# EAGLE board relay-unit-XRF (EAGLE 6.4)
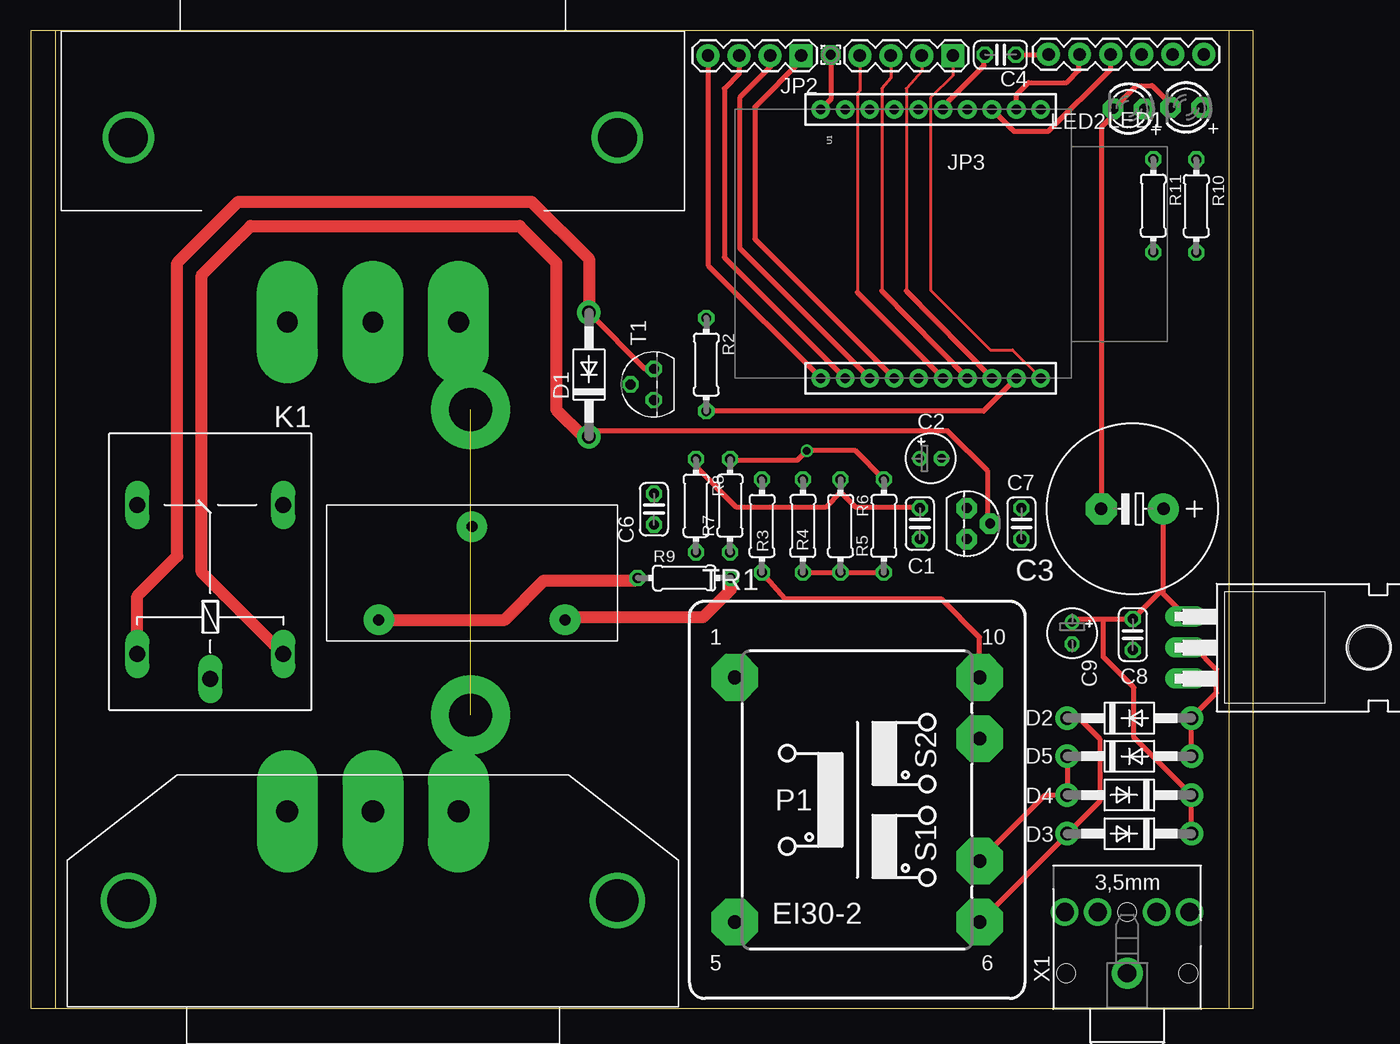
[diagram p0: board, top side]
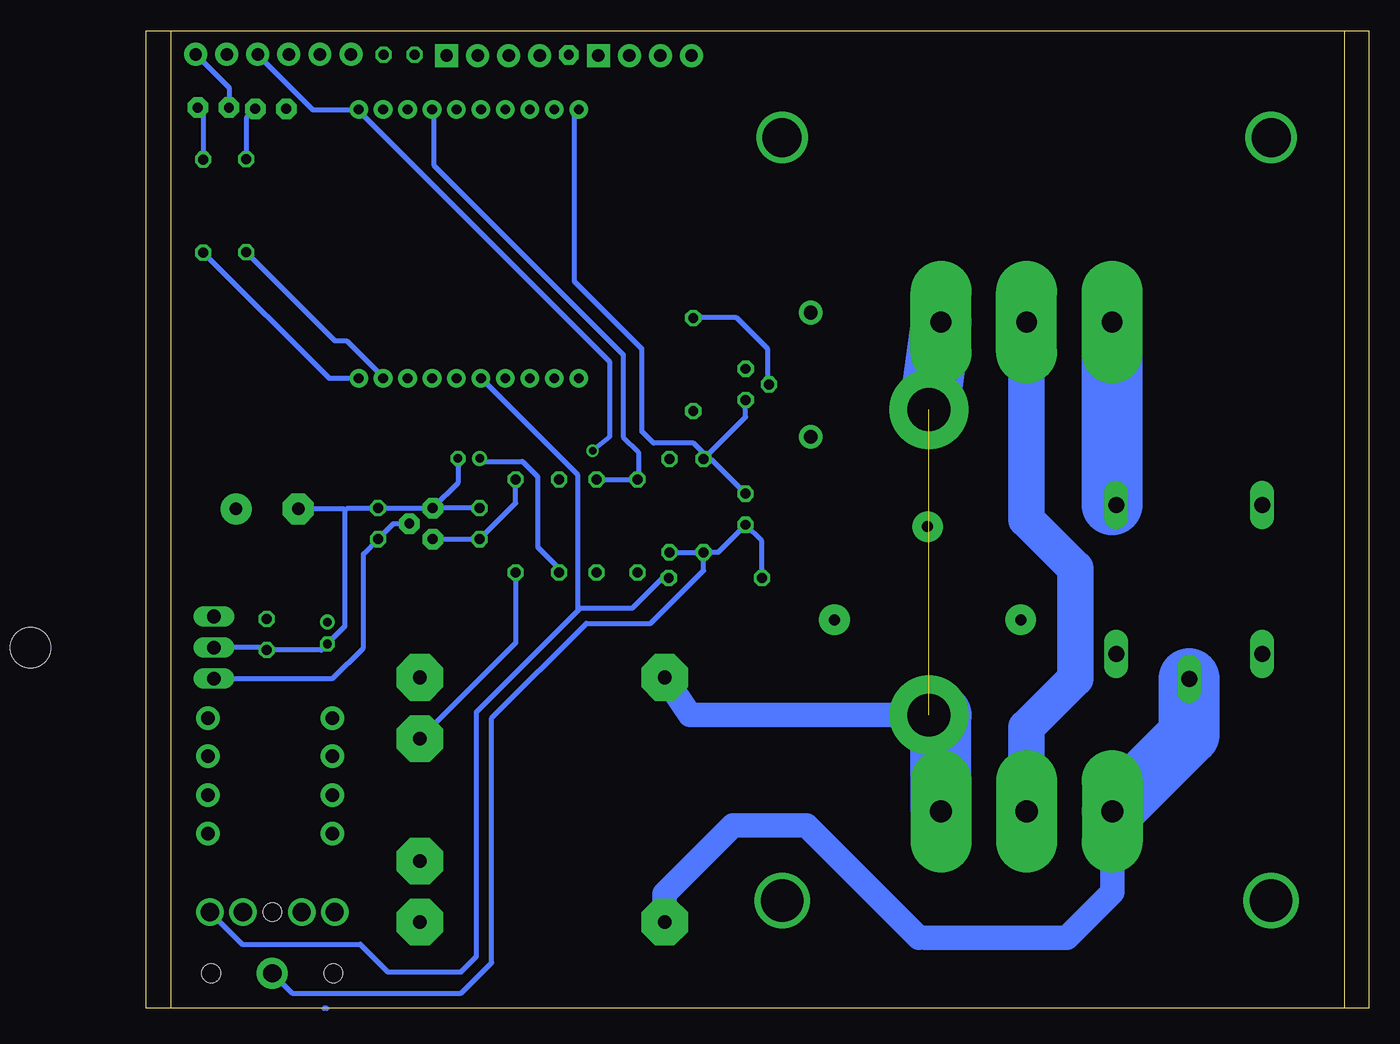
[diagram p1: board, bottom side, seen from below]

Size 100 x 80 mm. Coordinates in mm from the lower left corner, seen from the top.
Outline: 2,0 0,0 0,80 2,80
Outline: 2,0 98,0
Outline: 98,0 100,0 100,80 98,80
Outline: 98,80 2,80
Outline: 2,80 2,0
Outline: 98,80 98,0
Copper layers (1*16): Top 0.035mm / dielectric 1.5mm / Bottom 0.035mm
Design rules "default": minimum track width 10mil, minimum drill 24mil, track to track 8mil, track to pad 8mil, pad to pad 8mil, via to via 8mil, smd to smd 8mil, copper to edge 40mil, drill to drill 8mil, minimum pad ring 10mil, minimum via ring 8mil, stop-mask expansion 4mil, vias tented up to drill 0mil, thermal gap 10mil

## Footprints (pad centres in the part's own frame; a part is rotated, then mirrored left to right if it is on the bottom)
C025-024X044 = drill 0.813 octagon: 1 -1.27,0; 2 1.27,0
E1,8-4 = drill 0.711 pad 1.168: + -0.889,0 | drill 0.711 pad 1.168 octagon: - 0.889,0
E5-13 = drill 1.016 pad 2.54: + -2.54,0 | drill 1.016 pad 2.54 octagon: - 2.54,0
DO41-10 = drill 1.118 pad 1.93: A 5.08,0; C -5.08,0
TO92 = drill 0.813 pad 1.676 octagon: 1 -1.27,0; 2 0,1.905; 3 1.27,0
TO220H = drill 1.118 long: 1 -2.54,-10.16; 2 0,-10.16; 3 2.54,-10.16 | hole 3.302: 0,4.826
FTDI_BASIC = drill 1.016 pad 1.88: CTS 10.16,0; DTR 0,0; GND 12.7,0; RXI 2.54,0; TXO 5.08,0; VCC 7.62,0
1X04 = drill 1.016 pad 1.88 square: 1 0,0 | drill 1.016 pad 1.88: 2 2.54,0; 3 5.08,0; 4 7.62,0
G5LE = drill 1.321 long: 1 -7.493,-5.969; 2 -7.493,5.969; O 4.699,5.969; P -9.525,0; S 4.699,-5.969
LED3MM = drill 0.813 pad 1.676 octagon: A -1.27,0; K 1.27,0
1,6/0,8 = drill 0.813 pad 1.6 octagon: 1 0,0
0204/7 = drill 0.813 octagon: 1 -3.81,0; 2 3.81,0
TO92' = drill 0.813 octagon: 1 1.27,0; 2 0,1.905; 3 -1.27,0
EI30-2 = drill 1.118 pad 3.81 octagon: 1 -10.008,10.008; 5 -10.008,-10.008; 6 10.008,-10.008; 7 10.008,-5.004; 9 10.008,5.004; 10 10.008,10.008
RFµ-328-SOCKET = drill 0.8 pad 1.524: 1 -11,20; 2 -11,18; 3 -11,16; 4 -11,14; 5 -11,12; 6 -11,10; 7 -11,8; 8 -11,6; 9 -11,4; 10 -11,2; 11 11,2; 12 11,4; 13 11,6; 14 11,8; 15 11,10; 16 11,12; 17 11,14; 18 11,16; 19 11,18; 20 11,20
TEST = drill 1.7 pad 5 long: EARTH 0,-15.1; LIVE -7,-15.1; NEUTRAL 7,-15.1 | drill 1.7 pad 3.5 octagon: LIVE1 -7,-15.1 | drill 3.2: P$4 -20,0; P$5 20,0
AC_IN = drill 1.8 pad 5 long: EARTH 0,0; LIVE 7,0; NEUTRAL -7,0 | drill 3.5: P$4 20,7.3; P$5 -20,7.3
CT = drill 0.9 pad 2.5: CT1 7.62,0; CT2 -7.62,0; P$3 0,-7.62
STX3100 = drill 1.5 pad 2.54: 1 2.7,-0.1 | drill 1.5: 2 7.7,5; 3 7.7,2.3; 4 7.7,-2.5; 5 7.7,-5.2 | hole 1.5: 2.7,4.9; 2.7,-5.1; 7.7,-0.1

## Placement (x,y rotation side)
C1  0.1u  [C025-024X044]  72.75,39.66 90 top
C2  10uf  [E1,8-4]  73.62,45 0 top
C3  2200uF  [E5-13]  90.12,40.88 180 top
C4  0.1u  [C025-024X044]  79.33,78.03 0 top
C6  10uF  [C025-024X044]  50.99,40.84 90 top
C7  0.1u  [C025-024X044]  81.06,39.66 90 top
C8  0.1u  [C025-024X044]  90.16,30.59 270 top
C9  10uf  [E1,8-4]  85.2,30.71 270 top
D1  1N4004  [DO41-10]  45.67,51.85 90 top
D2  1N4004  [DO41-10]  89.88,23.75 0 top
D3  1N4004  [DO41-10]  89.88,14.29 180 top
D4  1N4004  [DO41-10]  89.88,17.46 180 top
D5  1N4004  [DO41-10]  89.88,20.63 0 top
IC1  [TO92]  76.58,39.66 270 top
IC2  7805T  [TO220H]  104.65,29.52 270 top
JP1  FTDI_BASICPTH  [FTDI_BASIC]  83.27,78.05 0 top
JP2  [1X04]  63.03,77.95 180 top
JP3  [1X04]  75.44,77.95 180 top
K1  G5LE  [G5LE]  14.71,36.49 90 top
LED1  [LED3MM]  94.52,73.7 180 top
LED2  [LED3MM]  89.83,73.61 180 top
PAD4  [1,6/0,8]  65.45,78.02 0 top
R2  10k  [0204/7]  55.27,52.67 270 top
R3  [0204/7]  59.83,39.48 270 top
R4  [0204/7]  63.17,39.48 90 top
R5  470k  [0204/7]  69.8,39.48 90 top
R6  470k  [0204/7]  66.25,39.48 270 top
R7  470k  [0204/7]  57.22,41.13 90 top
R8  470k  [0204/7]  54.43,41.13 270 top
R9  100R  [0204/7]  53.47,35.22 0 top
R10  100R  [0204/7]  95.35,65.64 270 top
R11  100R  [0204/7]  91.83,65.67 270 top
T1  2N3904  [TO92']  50.98,51.05 90 top
TR1  [EI30-2]  67.62,17.07 0 top
U1  RFµ-328-SOCKET  [RFµ-328-SOCKET]  62.63,62.55 270 top
U$1  TESTTEST  [TEST]  28,71.25 0 top
U$2  AC_IN  [AC_IN]  28,16.12 180 top
U$3  CT  [CT]  36.1,31.8 180 top
X1  STEREOJACK  [STX3100]  89.6,0.18 90 top

## Library data of the parts
C1 C4 C6-C8 = resistor
C2 C3 C9 R2-R11 = rcl
D1-D5 IC1 IC2 LED1 LED2 X1 = adafruit
JP1-JP3 = SparkFun
K1 = relay; OC_FARNELL: unknown; OC_NEWARK: unknown
PAD4 = wirepad
T1 = transistor
TR1 = trafo
U1 = Ciseco Footprints
U$1-U$3 = trystan

## Nets
5V: C7.1 D1.C IC1.2 IC2.3 K1.1
GND: C1.2 C2.- C3.- C6.2 C7.2 C8.2 C9.- D2.A D5.A IC1.1 IC2.2 JP1.GND LED1.K LED2.K PAD4.1 R6.1 R8.1 T1.3 U1.10
N$1: JP1.RXI U1.2
N$2: JP1.TXO U1.3
N$3: C4.2 JP1.DTR
N$4: JP2.1 U1.14
N$5: JP2.2 U1.13
N$6: JP2.3 U1.12
N$7: JP2.4 U1.11
N$8: C4.1 U1.5
N$9: JP3.1 R10.2 U1.20
N$10: JP3.2 U1.18
N$11: JP3.3 U1.17
N$12: JP3.4 U1.16
N$13: C3.+ C8.1 C9.+ D3.C D4.C IC2.1
N$14: R3.2 TR1.10
N$15: R2.1 T1.2
N$16: D1.A K1.2 T1.1
N$17: R2.2 R11.2 U1.19
N$19: K1.S U$1.LIVE
N$20: TR1.1 U$1.NEUTRAL U$2.NEUTRAL
N$21: C2.+ R4.1 R5.1 R6.2 TR1.9
N$22: D2.C D3.A TR1.6
N$25: R9.2 U1.15 U$3.CT2 X1.5
N$26: C6.1 R7.1 R8.2 R9.1 U$3.CT1 X1.1
N$27: R3.1 R4.2 U1.4
N$28: D4.A D5.C TR1.7
N$36: U$1.EARTH U$2.EARTH
N$37: LED1.A R10.1
N$38: LED2.A R11.1
N$40: K1.P TR1.5 U$2.LIVE
VCC: C1.1 IC1.3 JP1.VCC R5.2 R7.2 U1.1

## Tracks (layer width: path | path; a pad name or v marks a point on that pad's centre or on a via)
5V
  Top 0.406: IC1.2 78.25,39.9 78.25,44 75,47.25 46.16,47.25 D1.C 45.23,46.77
  Top 1: K1.1 14,35.67 14,60 18,64 40,64 43,61 43,49 45.23,46.77
  Bottom 0.406: IC2.3 94.47,27 84.75,27 82.25,29.5 82.25,37.2 C7.1 79.79,39.66 IC1.2 | IC1.2 78.5,39.5 | IC1.2 78.5,39.75 78.25,39.5
GND
  Top 0.406: PAD4.1 65.45,74.37 U1.10 | D5.A D2.A 97,25.8 97,27.75 95.22,29.52 IC2.2 | C1.2 72.67,41 67.5,41 66.25,42.25 | R6.1 66.25,42.25 | 66.25,42.25 65,41 57.75,41 54.43,44.32 R8.1 | C3.- 87.62,40.91 87.62,72.12 88.56,73.06 LED2.K 90.45,75.5 91.75,75.5 93.25,74 LED1.K
  Bottom 0.406: JP1.GND 93.25,75.33 LED1.K | U1.10 65,73.19 65,59.5 59.5,54 59.5,47.25 58.5,46.25 55.25,46.25 54.43,45.43 R8.1 | IC2.2 90.36,29.52 C8.2 85.71,29.32 C9.- 83.75,31.28 83.75,40.75 | 83.75,40.75 83.88,40.88 C3.- | 83.75,40.75 83.57,40.93 C7.2 IC1.1 | C1.2 IC1.1 | C2.- 74.51,43 IC1.1 | R8.1 53.83,44.94 C6.2 | R8.1 50.98,48.39 T1.3
N$1
  Top 0.406: U1.2 80.64,74.76 81.62,75.75 84.75,75.75 85.75,76.75 85.75,77.99 JP1.RXI
N$2
  Top 0.406: U1.3 80.44,71.75 83.25,71.75 88.35,76.85 JP1.TXO
N$3
  Top 0.406: C4.2 83.25,78.03 JP1.DTR
N$4
  Top 0.406: JP2.1 63.03,77.53 59.25,73.75 59.25,62.94 U1.14
N$5
  Top 0.406: JP2.2 60.49,77 58,74.5 58,62.19 U1.13
N$6
  Top 0.406: JP2.3 57.95,76.45 56.75,75.25 56.75,61.44 U1.12
N$7
  Top 0.406: JP2.4 55.41,60.77 U1.11
N$8
  Top 0.406: U1.5 74.64,73.76 78,77.12 78,77.96 C4.1
N$9
  Top 0.254: JP3.1 75.44,76.32 73.62,74.5 73.62,58.75 78.5,53.88 80.31,53.88 U1.20
  Bottom 0.406: R10.2 85.07,51.55 U1.20
N$10
  Top 0.254: JP3.2 72.91,76.66 71.62,75.25 71.62,58.69
  Top 0.406: 71.62,58.69 U1.18
N$11
  Top 0.254: JP3.3 70.36,76.11 69.62,75.25 69.62,58.69
  Top 0.406: 69.62,58.69 U1.17
N$12
  Top 0.254: JP3.4 67.83,75.08 67.62,74.88 67.62,58.56
  Top 0.406: 67.62,58.56 U1.16
N$13
  Top 0.406: D3.C D4.C 90.25,22.16 90.25,26.25 87.75,28.75 87.75,31.75 87.86,31.86 | IC2.1 92.67,33.89 92.67,34.37 | 92.67,34.37 C3.+ | C8.1 92.67,34.37 | 87.86,31.86 88,31.86 C8.1 | C8.1 90.02,32 90,32 | C9.+ 85.46,31.86 87.86,31.86
N$14
  Top 0.406: TR1.10 77.63,30.37 74.5,33.5 61.74,33.5 R3.2
N$15
  Bottom 0.406: R2.1 55.26,56.5 51.75,56.5 49.17,53.92 49.17,51.16 T1.2
N$16
  Top 0.406: D1.A 50.28,52.33 T1.1
  Top 1: K1.2 8.74,33.74 12,37 12,61 17,66 41,66 45.67,61.33 D1.A
N$17
  Top 0.406: U1.19 77.94,48.87 R2.2
  Bottom 0.406: R11.2 84.59,54.62 83.62,54.62 80.64,51.63 U1.19
N$19
  Bottom 0.406: K1.S 21,41.19
  Bottom 5: 21,41.19 U$1.LIVE
N$20  (1 unrouted)
  Bottom 2: 36,24 55.53,24 TR1.1
  Bottom 5: U$2.NEUTRAL 35,24 36,24 | U$1.NEUTRAL 36,49
N$21
  Top 0.406: R4.1 R6.2 R5.1
  Bottom 0.406: R5.1 69.8,29.91 TR1.9 | C2.+ 72.49,44.75 69.25,44.75 68,43.5 68,37.75 66.25,36 R6.2
N$22
  Top 0.406: TR1.6 84.8,14.23 D3.A 87.5,17 87.5,22 85.75,23.75 D2.C
N$25
  Top 0.406: 43.92,32 U$3.CT2
  Top 1: R9.2 57.27,34.27 55,32 43.92,32
  Bottom 0.406: X1.5 92.17,5.25 82.5,5.25 80.25,3 74.25,3 73,4.25 73,24.25 64.75,32.5 | U1.15 64.75,43.67 64.75,32.5 | 64.75,32.5 64.5,32.75 60.25,32.75 57.78,35.22 R9.2
N$26
  Top 1: U$3.CT1 38.8,31.8 42,35 49.44,35 R9.1
  Bottom 0.406: X1.1 88.07,1.25 74.25,1.25 71.75,3.75 71.75,23.75 64,31.5 58.75,31.5 54.43,35.82 R8.2 | R7.1 R8.2 | R8.2 53.24,37.32 C6.1 49.66,38.23 R9.1
N$27
  Bottom 0.406: U1.4 76.5,73.42 76.5,69 61,53.5 61,46.75 59.75,45.5 59.75,43.36 R3.1 R4.2
N$28
  Top 0.406: TR1.7 83.02,17.46 D4.A D5.C
N$30
  Bottom 0.406: 85.25,0 85.5,0
N$32  (via drill 3.5 pad 6.45)
  other vias: 36,24
N$33  (via drill 3.5 pad 6.45)
  other vias: 36,49
N$36
  Bottom 3: U$1.EARTH 28,40 24,36 24,27 28,23 U$2.EARTH
N$37
  Bottom 0.406: LED1.A 95.35,73.27 R10.1
N$38
  Bottom 0.406: LED2.A 91.83,72.87 R11.1
N$40
  Bottom 0.406: 36.34,5.8 36.8,5.8
  Bottom 2: U$2.LIVE 21,9.5 24.7,5.8 36.34,5.8 | 36.8,5.8 46,15 52,15 57.61,9.39 TR1.5
  Bottom 5: U$2.LIVE 14.71,22.42 K1.P
VCC  (via drill 0.6)
  Top 0.406: R5.2 67.45,45.62 v63.5,45.62 62.75,44.88 57.28,44.88 R7.2
  Bottom 0.406: U1.1 82.69,73.5 | 82.69,73.5 86.38,73.5 90.89,78.02 JP1.VCC | 82.69,73.5 62.12,52.94 62.12,46.75 v63.5,45.62 | IC1.3 C1.1 69.8,41.34 R5.2